# EAGLE board Shift_Register_IO_Breakout (EAGLE 9.6.2)
AUTHOR: Adam Billingsley; VERSION: v1.0
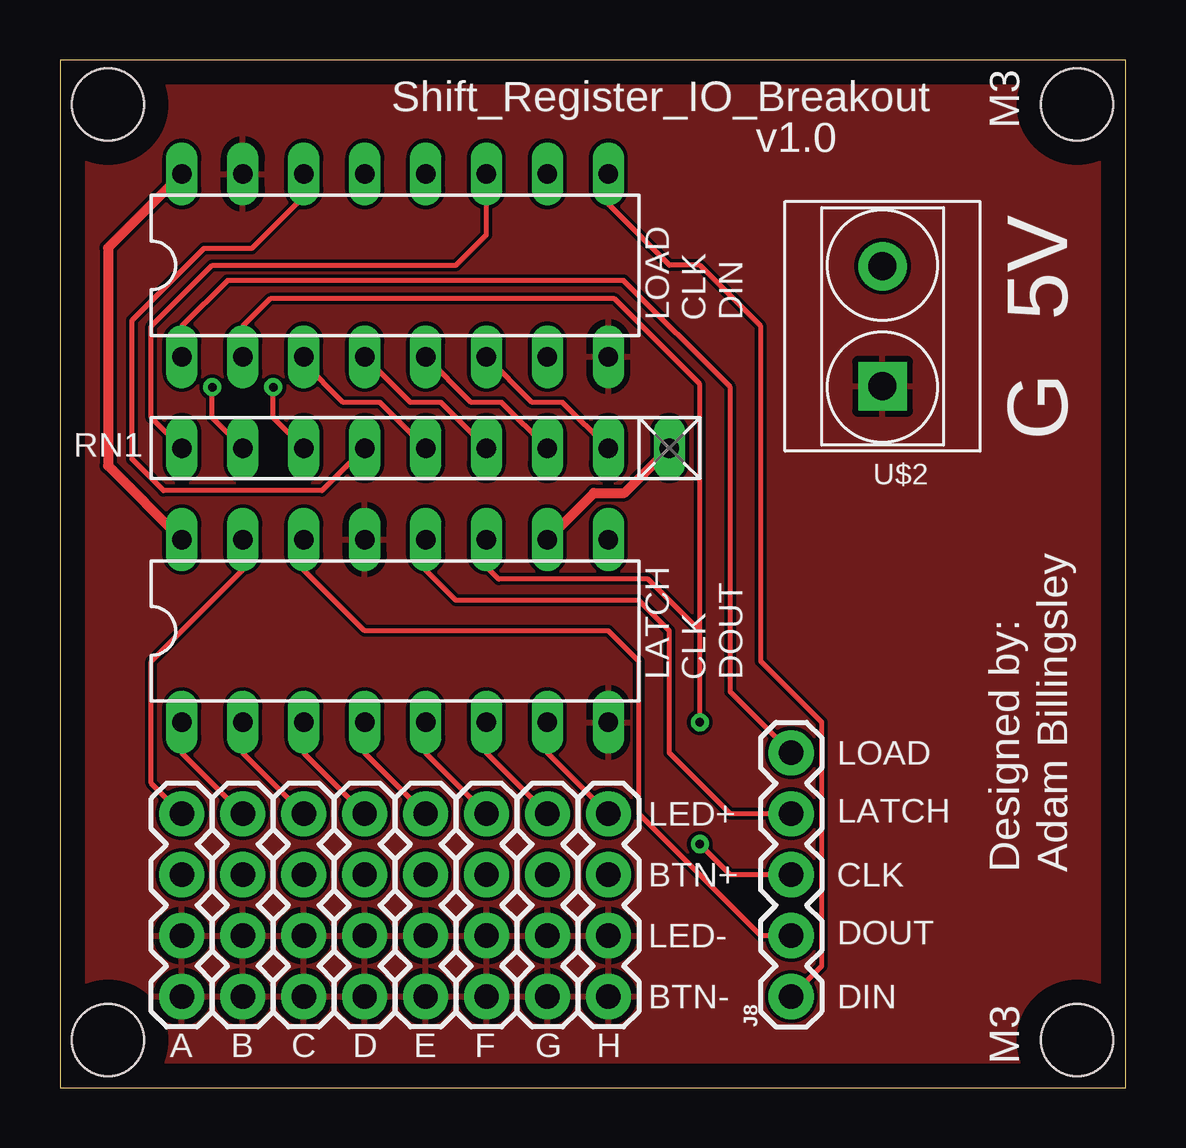
[diagram p0: board, top side]
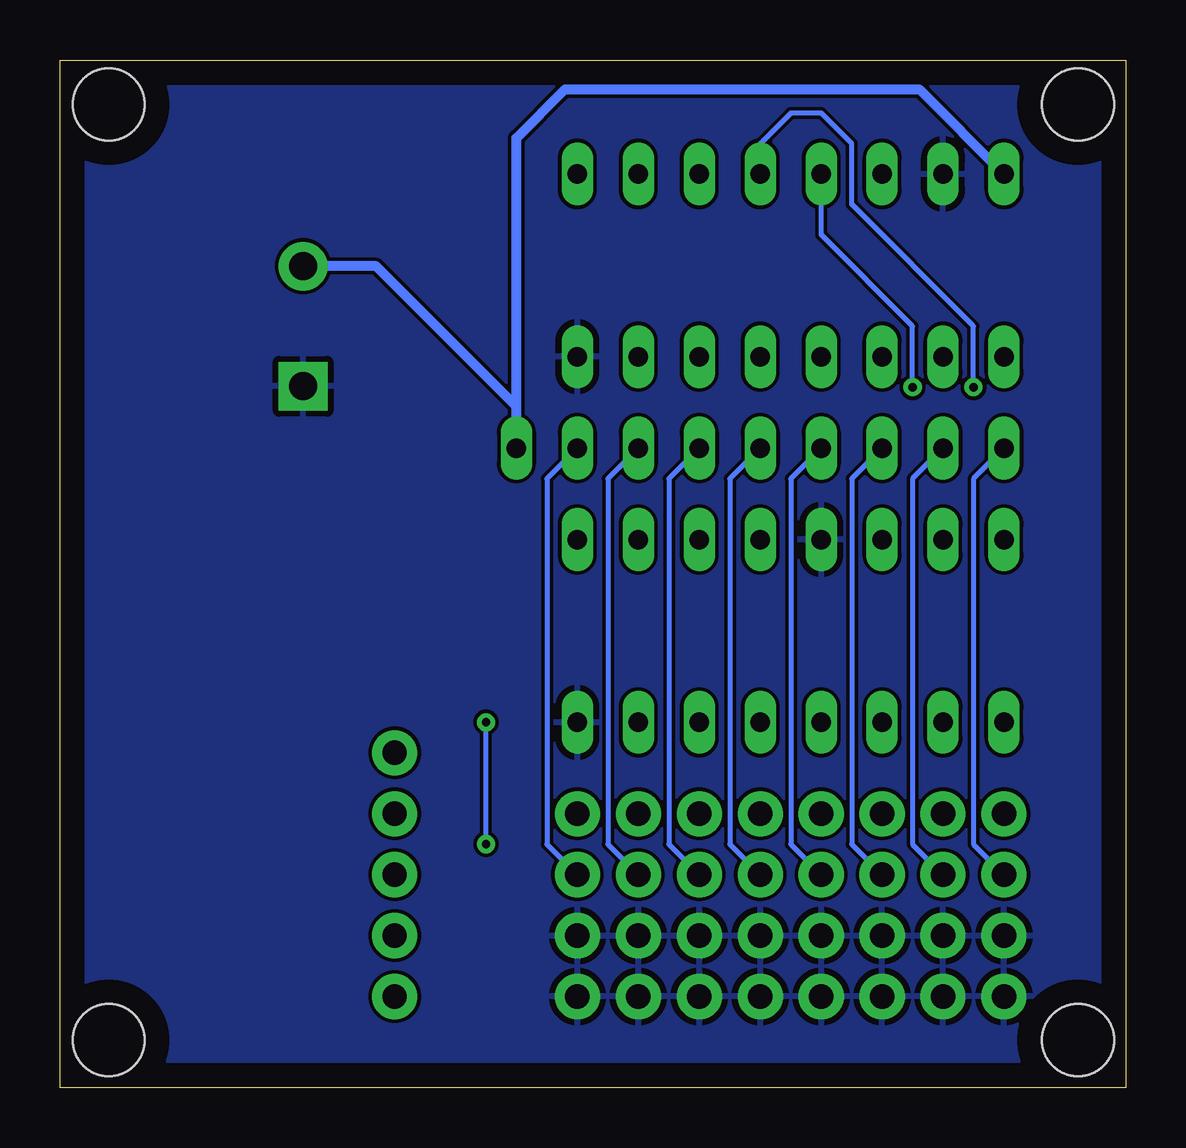
[diagram p1: board, bottom side, seen from below]

Size 44.43 x 42.85 mm. Coordinates in mm from the lower left corner, seen from the top.
Outline: 0,0 44.43,0 44.43,42.85 0,42.85 0,0
Copper layers (1*16): Top 0.035mm / dielectric 1.5mm / Bottom 0.035mm
Design rules "default": minimum track width 6mil, minimum drill 0.35mm, track to track 6mil, track to pad 6mil, pad to pad 6mil, via to via 6mil, smd to smd 6mil, copper to edge 40mil, drill to drill 6mil, minimum pad ring 10mil, minimum via ring 8mil, stop-mask expansion 4mil, vias tented up to drill 0mil, thermal gap 10mil
Holes 3 mm at 2,2 2,41 42.4,41 42.4,2

## Footprints (pad centres in the part's own frame; a part is rotated, then mirrored left to right if it is on the bottom)
1X04 = drill 1.016 pad 1.88: 1 0,0; 2 2.54,0; 3 5.08,0; 4 7.62,0
1X05 = drill 1.016 pad 1.88: 1 0,0; 2 2.54,0; 3 5.08,0; 4 7.62,0; 5 10.16,0
RN-9 = drill 0.813 long: 1 -10.16,0; 2 -7.62,0; 3 -5.08,0; 4 -2.54,0; 5 0,0; 6 2.54,0; 7 5.08,0; 8 7.62,0; 9 10.16,0
DIL16 = drill 0.813 long: 1 -8.89,-3.81; 2 -6.35,-3.81; 3 -3.81,-3.81; 4 -1.27,-3.81; 5 1.27,-3.81; 6 3.81,-3.81; 7 6.35,-3.81; 8 8.89,-3.81; 9 8.89,3.81; 10 6.35,3.81; 11 3.81,3.81; 12 1.27,3.81; 13 -1.27,3.81; 14 -3.81,3.81; 15 -6.35,3.81; 16 -8.89,3.81
H2-5.0-10.5X8.0MM = drill 1.168 pad 2.032 square: 1 0,2.5 | drill 1.168 pad 2.032: 2 0,-2.5

## Placement (x,y rotation side)
FRAME1  FRAME-LETTER  [CREATIVE_COMMONS]  21,-8 0 top  (outside the outline)
J0  [1X04]  5.08,11.43 270 top
J1  [1X04]  7.62,11.43 270 top
J2  [1X04]  10.16,11.43 270 top
J3  [1X04]  12.7,11.43 270 top
J4  [1X04]  15.24,11.43 270 top
J5  [1X04]  17.78,11.43 270 top
J6  [1X04]  20.32,11.43 270 top
J7  [1X04]  22.86,11.43 270 top
J8  [1X05]  30.48,3.81 90 top
RN1  4K7  [RN-9]  15.24,26.67 180 top
U$1  SN74HC165  [DIL16]  13.97,34.29 0 top
U$2  TERMINAL_BLOCK_2P  [H2-5.0-10.5X8.0MM]  34.29,31.75 180 top
U$3  SN74HC595  [DIL16]  13.97,19.05 0 top

## Library data of the parts
FRAME1 U$1-U$3 = Adam's Parts (work)
J0 J1-J7 = SparkFun-Connectors; PROD_ID: CONN-09696
J8 = SparkFun-Connectors
RN1 = resistor-net; OC_FARNELL: unknown; OC_NEWARK: unknown

## Nets
A: J0.2 RN1.9 U$1.11
B: J1.2 RN1.8 U$1.12
C: J2.2 RN1.7 U$1.13
CLK: J8.3 U$1.2 U$3.11
D: J3.2 RN1.6 U$1.14
DIN: J8.1 U$1.9
DOUT: J8.2 U$3.14
E: J4.2 RN1.5 U$1.3
F: J5.2 RN1.4 U$1.4
G: J6.2 RN1.3 U$1.5
GND: J0.3 J0.4 J1.3 J1.4 J2.3 J2.4 J3.3 J3.4 J4.3 J4.4 J5.3 J5.4 J6.3 J6.4 J7.3 J7.4 U$1.8 U$1.15 U$2.1 U$3.8 U$3.13
H: J7.2 RN1.2 U$1.6
LATCH: J8.4 U$3.12
LOAD: J8.5 U$1.1
N$5: U$1.7
QA: J0.1 U$3.15
QB: J1.1 U$3.1
QC: J2.1 U$3.2
QD: J3.1 U$3.3
QE: J4.1 U$3.4
QF: J5.1 U$3.5
QG: J6.1 U$3.6
QH: J7.1 U$3.7
VCC: RN1.1 U$1.16 U$2.2 U$3.10 U$3.16

## Tracks (layer width: path | path; a pad name or v marks a point on that pad's centre or on a via)
A
  Top 0.203: RN1.9 3.81,27.94 3.81,31.75 6.35,34.29 16.51,34.29 17.78,35.56 U$1.11
  Bottom 0.203: RN1.9 6.35,25.4 6.35,10.16 J0.2
B  (via drill 0.35)
  Top 0.203: RN1.8 6.35,27.94 v6.35,29.21
  Bottom 0.203: v6.35,29.21 6.35,31.75 11.43,36.83 11.43,39.37 12.7,40.64 13.97,40.64 15.24,39.37 U$1.12 | RN1.8 8.89,25.4 8.89,10.16 J1.2
C  (via drill 0.35)
  Top 0.203: RN1.7 8.89,27.94 v8.89,29.21
  Bottom 0.203: v8.89,29.21 8.89,31.75 12.7,35.56 U$1.13 | RN1.7 11.43,25.4 11.43,10.16 J2.2
CLK  (via drill 0.35)
  Top 0.203: J8.3 27.94,8.89 v26.67,10.16 | v26.67,15.24 26.67,19.05 | 26.67,19.05 24.51,21.21 18.29,21.21 17.78,21.72 U$3.11 | U$1.2 7.62,31.75 8.76,32.89 23.11,32.89 26.67,29.34 26.67,19.05
  Bottom 0.203: v26.67,10.16 v26.67,15.24
D
  Top 0.203: RN1.6 10.92,24.89 4.32,24.89 3,26.21 3,32 6,35 8,35 10.16,37.16 U$1.14
  Bottom 0.203: RN1.6 13.97,25.4 13.97,10.16 J3.2
DIN
  Top 0.203: J8.1 31.75,5.08 31.75,15.24 29.21,17.78 29.21,31.75 26.67,34.29 25.4,34.29 22.86,36.83 U$1.9
DOUT
  Top 0.203: J8.2 29.21,6.35 24.13,11.43 24.13,17.78 22.86,19.05 12.7,19.05 10.16,21.59 U$3.14
E
  Top 0.203: RN1.5 13.34,28.57 11.81,28.57 10.16,30.23 U$1.3
  Bottom 0.203: RN1.5 16.51,25.4 16.51,10.16 J4.2
F
  Top 0.203: RN1.4 15.88,28.57 14.61,28.57 U$1.4
  Bottom 0.203: RN1.4 19.05,25.4 19.05,10.16 J5.2
G
  Top 0.203: RN1.3 18.41,28.57 17.14,28.57 U$1.5
  Bottom 0.203: RN1.3 21.59,25.4 21.59,10.16 J6.2
GND
  pour Top: 0,0 0,43 44.5,43 44.5,0
  pour Bottom: 0,0 0,43 44.5,43 44.5,0
H
  Top 0.203: RN1.2 20.95,28.57 19.68,28.57 U$1.6
  Bottom 0.203: RN1.2 24.13,25.4 24.13,10.16 J7.2
LATCH
  Top 0.203: J8.4 27.94,11.43 25.4,13.97 25.4,19.05 24.13,20.32 16.51,20.32 15.24,21.59 U$3.12
LOAD
  Top 0.203: J8.5 27.94,16.51 27.94,29.21 23.5,33.66 6.99,33.66 5.08,31.75 U$1.1
QA
  Top 0.203: J0.1 3.81,12.7 3.81,17.78 7.62,21.59 U$3.15
QB
  Top 0.203: J1.1 5.08,13.97 U$3.1
QC
  Top 0.203: J2.1 7.62,13.97 U$3.2
QD
  Top 0.203: J3.1 10.16,13.97 U$3.3
QE
  Top 0.203: J4.1 12.7,13.97 U$3.4
QF
  Top 0.203: J5.1 15.24,13.97 U$3.5
QG
  Top 0.203: J6.1 17.78,13.97 U$3.6
QH
  Top 0.203: J7.1 20.32,13.97 U$3.7
VCC
  Top 0.406: U$1.16 2,35.02 2,25.94 U$3.16 | U$3.10 22.26,24.8 23.53,24.8 RN1.1
  Bottom 0.406: RN1.1 25.4,28.4 | U$2.2 31.25,34.25 25.4,28.4 | 25.4,28.4 25.4,39.6 23.37,41.63 8.61,41.63 U$1.16

## Text on the board
tPlace: M3 | LOAD / CLK / DIN | 5V | G | LATCH / CLK / DOUT | LOAD | LED+ | LATCH | Designed by: | BTN+ | CLK | LED- | DOUT | BTN- | DIN | A | B | C | D | E | F | G | H | M3